# EAGLE board PR-Modem-PY (EAGLE 6.3)
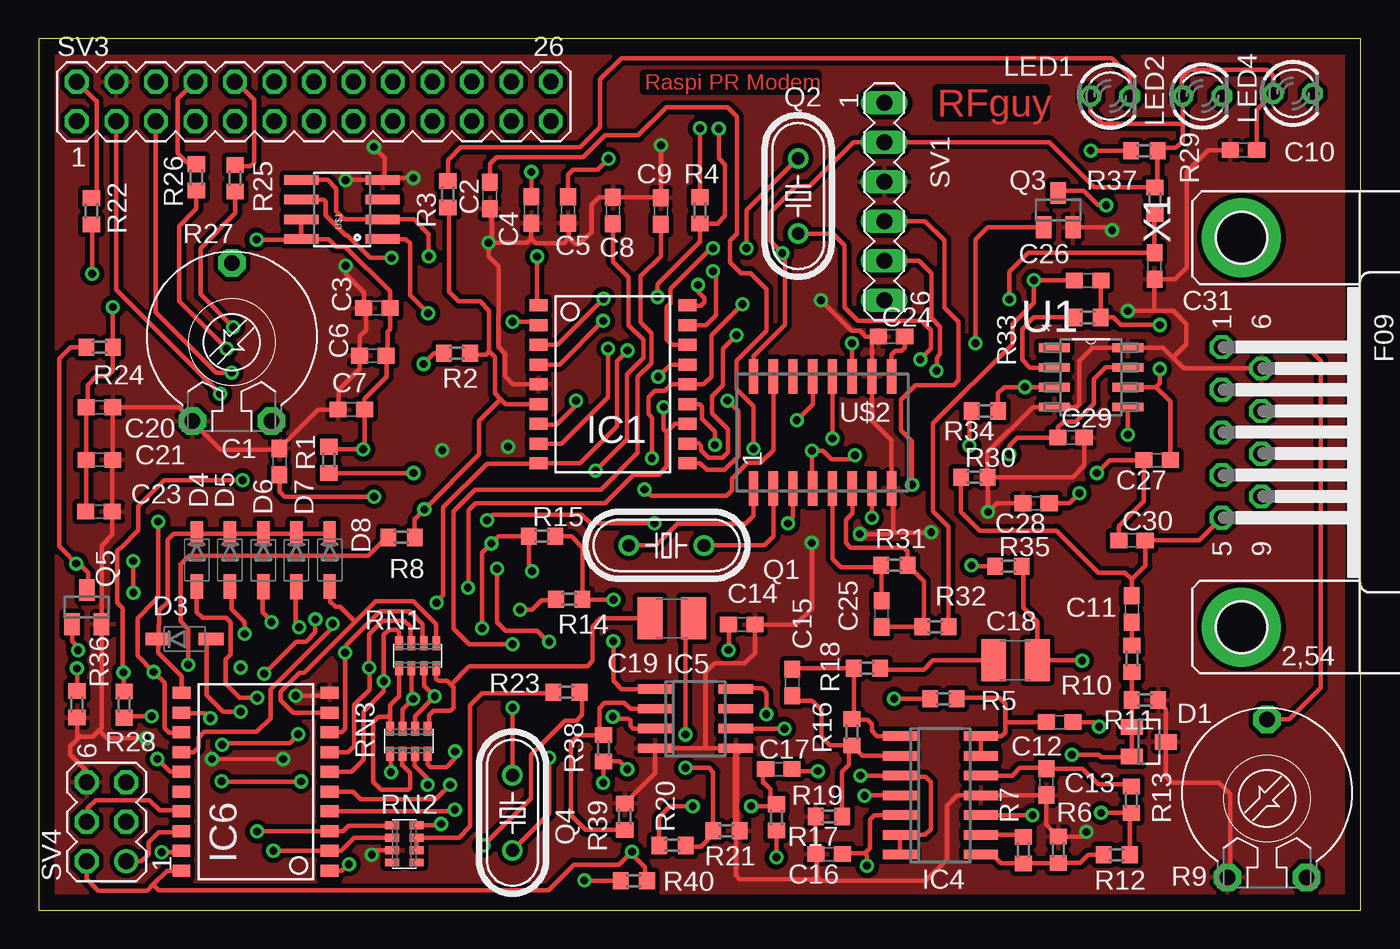
[diagram p0: board, top side]
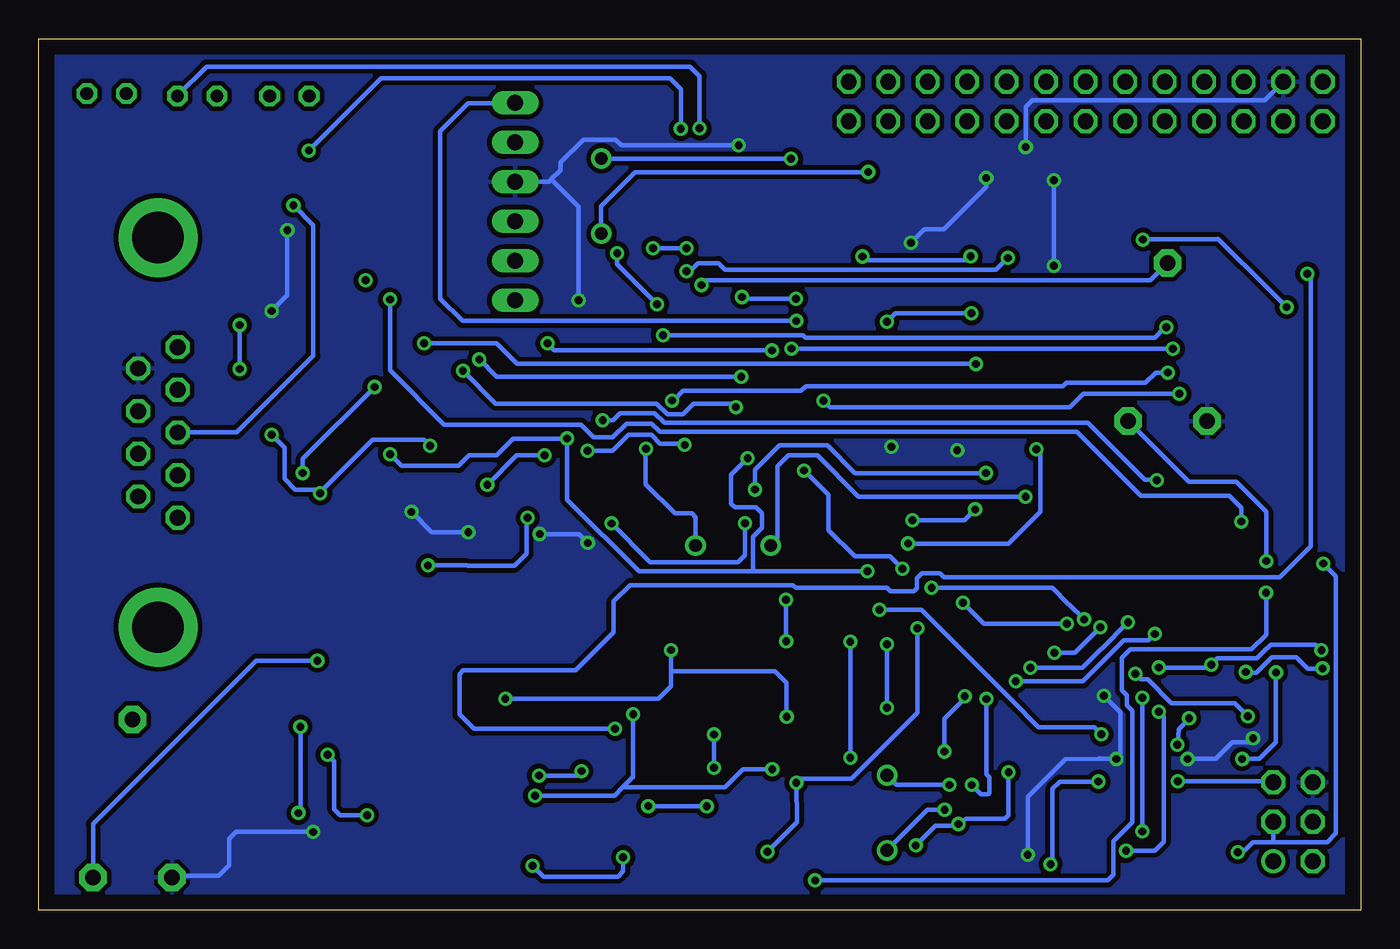
[diagram p1: board, bottom side, seen from below]

Size 85 x 56 mm. Coordinates in mm from the lower left corner, seen from the top.
Outline: 0,0 85,0 85,56 0,56 0,0
Copper layers (1*16): Top 0.035mm / dielectric 1.5mm / Bottom 0.035mm
Design rules "default": minimum track width 10mil, minimum drill 24mil, track to track 8mil, track to pad 8mil, pad to pad 8mil, via to via 8mil, smd to smd 8mil, copper to edge 40mil, drill to drill 8mil, minimum pad ring 10mil, minimum via ring 8mil, stop-mask expansion 4mil, vias tented up to drill 0mil, thermal gap 10mil

## Footprints (pad centres in the part's own frame; a part is rotated, then mirrored left to right if it is on the bottom)
C0603 = smd 1.1 x 1: 1 -0.85,0; 2 0.85,0
C1210 = smd 1.6 x 2.7: 1 -1.4,0; 2 1.4,0
SOT23 = smd 1 x 1.4: 1 -0.95,-1.1; 2 0.95,-1.1; 3 0,1.1
SOD123 = smd 1.6 x 0.8: 1 -1.7,0; 2 1.7,0
SOIC18-W = smd 0.762 x 1.143: 1 -5.08,-4.788; 2 -3.81,-4.788; 3 -2.54,-4.788; 4 -1.27,-4.788; 5 0,-4.788; 6 1.27,-4.788; 7 2.54,-4.788; 8 3.81,-4.788; 9 5.08,-4.788; 10 5.08,4.788; 11 3.81,4.788; 12 2.54,4.788; 13 1.27,4.788; 14 0,4.788; 15 -1.27,4.788; 16 -2.54,4.788; 17 -3.81,4.788; 18 -5.08,4.788
SO14 = smd 0.6 x 2.2: 1 -3.81,-2.6; 2 -2.54,-2.6; 3 -1.27,-2.6; 4 0,-2.6; 5 1.27,-2.6; 6 2.54,-2.6; 7 3.81,-2.6; 8 3.81,2.6; 9 2.54,2.6; 10 1.27,2.6; 11 0,2.6; 12 -1.27,2.6; 13 -2.54,2.6; 14 -3.81,2.6
SO08 = smd 0.6 x 2.2: 1 -1.905,-2.6; 2 -0.635,-2.6; 3 0.635,-2.6; 4 1.905,-2.6; 5 1.905,2.6; 6 0.635,2.6; 7 -0.635,2.6; 8 -1.905,2.6
SO20L = smd 0.762 x 1.143: 1 -5.08,-5.131; 2 -3.81,-5.131; 3 -2.54,-5.131; 4 -1.27,-5.131; 5 0,-5.131; 6 1.27,-5.131; 7 2.54,-5.131; 8 3.81,-5.131; 9 5.08,-5.131; 10 6.35,-5.131; 11 6.35,4.369; 12 5.08,4.394; 13 3.81,4.394; 14 2.54,4.394; 15 1.27,4.394; 16 0,4.394; 17 -1.27,4.394; 18 -2.54,4.394; 19 -3.81,4.394; 20 -5.08,4.394
LED3MM = drill 0.813 octagon: A -1.27,0; K 1.27,0
HC49/S = drill 0.813: 1 -2.413,0; 2 2.413,0
R0603 = smd 1 x 1.1: 1 -0.85,0; 2 0.85,0
PT-10 = drill 1.016 pad 1.778 octagon: 1 -2.54,-5.08; 2 2.54,-5.08; 3 0,5.08
CTS742C083 = smd 0.5 x 0.9: 1 -1.2,-0.8; 2 -0.4,-0.8; 3 0.4,-0.8; 4 1.2,-0.8; 5 1.2,0.8; 6 0.4,0.8; 7 -0.4,0.8; 8 -1.2,0.8
MA06-1 = drill 1.016 long: 1 -6.35,0; 2 -3.81,0; 3 -1.27,0; 4 1.27,0; 5 3.81,0; 6 6.35,0
MA13-2 = drill 1.016 octagon: 1 -15.24,-1.27; 2 -15.24,1.27; 3 -12.7,-1.27; 4 -12.7,1.27; 5 -10.16,-1.27; 6 -10.16,1.27; 7 -7.62,-1.27; 8 -7.62,1.27; 9 -5.08,-1.27; 10 -5.08,1.27; 11 -2.54,-1.27; 12 -2.54,1.27; 13 0,-1.27; 14 0,1.27; 15 2.54,-1.27; 16 2.54,1.27; 17 5.08,-1.27; 18 5.08,1.27; 19 7.62,-1.27; 20 7.62,1.27; 21 10.16,-1.27; 22 10.16,1.27; 23 12.7,-1.27; 24 12.7,1.27; 25 15.24,-1.27; 26 15.24,1.27
MA03-2 = drill 1.016: 1 -2.54,-1.27 | drill 1.016 octagon: 2 -2.54,1.27; 3 0,-1.27; 4 0,1.27; 5 2.54,-1.27; 6 2.54,1.27
SOIC127P600X175-8N = smd 1.981 x 0.559: 1 -2.362,1.905; 2 -2.362,0.635; 3 -2.362,-0.635; 4 -2.362,-1.905; 5 2.362,-1.905; 6 2.362,-0.635; 7 2.362,0.635; 8 2.362,1.905
SOIC8 = smd 0.61 x 2.21: 1 -1.905,-2.616; 2 -0.635,-2.616; 3 0.635,-2.616; 4 1.905,-2.616; 5 1.905,2.616; 6 0.635,2.616; 7 -0.635,2.616; 8 -1.905,2.616
SOIC16-3 = smd 0.6 x 2.2: 1 -4.445,-3.6; 2 -3.175,-3.6; 3 -1.905,-3.6; 4 -0.635,-3.6; 5 0.635,-3.6; 6 1.905,-3.6; 7 3.175,-3.6; 8 4.445,-3.6; 9 4.445,3.6; 10 3.175,3.6; 11 1.905,3.6; 12 0.635,3.6; 13 -0.635,3.6; 14 -1.905,3.6; 15 -3.175,3.6; 16 -4.445,3.6
F09HP = drill 1.016 octagon: 1 -5.486,-1.27; 2 -2.743,-1.27; 3 0,-1.27; 4 2.743,-1.27; 5 5.486,-1.27; 6 -4.115,1.27; 7 -1.372,1.27; 8 1.372,1.27; 9 4.115,1.27 | drill 3.302 pad 5.08: G1 -12.522,0; G2 12.522,0

## Placement (x,y rotation side)
C1  18p  [C0603]  15.47,28.82 270 top
C2  18p  [C0603]  29,45.94 90 top
C3  100n  [C0603]  21.73,38.69 0 top
C4  22p  [C0603]  31.67,45.01 90 top
C5  22p  [C0603]  34.03,45.01 90 top
C6  100n  [C0603]  21.48,35.63 0 top
C7  100n  [C0603]  20.09,32.17 0 top
C8  18p  [C0603]  36.92,44.97 270 top
C9  18p  [C0603]  40,44.94 270 top
C10  [C0603]  77.46,48.85 0 top
C11  100n  [C0603]  70.28,19.34 270 top
C12  470p  [C0603]  65.65,12.08 180 top
C13  220p  [C0603]  64.79,8.24 270 top
C14  * 1n  [C0603]  45.21,18.34 0 top
C15  *  [C0603]  48.44,14.63 270 top
C16  100p  [C0603]  50.82,3.59 180 top
C17  220p  [C0603]  47.59,9.06 180 top
C18  4u7  [C1210]  62.8,16.05 0 top
C19  1u  [C1210]  40.7,18.74 180 top
C20  100n  [C0603]  3.9,32.32 0 top
C21  100n  [C0603]  3.89,28.93 0 top
C23  100n  [C0603]  3.87,25.61 180 top
C24  100n  [C0603]  54.83,36.86 0 top
C25  100p  [C0603]  54.19,19.04 90 top
C26  100n  [C0603]  67.45,40.47 180 top
C27  10n  [C0603]  71.9,28.92 180 top
C28  100n  [C0603]  64.12,26.15 180 top
C29  100n  [C0603]  66.37,30.37 0 top
C30  10n  [C0603]  70.29,23.76 0 top
C31  [C0603]  71.74,41.39 90 top
D1  BAS70-04  [SOT23]  71.38,10.81 270 top
D3  [SOD123]  9.37,17.41 0 top
D4  [SOD123]  10.16,22.5 270 top
D5  [SOD123]  12.29,22.5 270 top
D6  [SOD123]  14.43,22.49 270 top
D7  [SOD123]  16.56,22.49 270 top
D8  [SOD123]  18.7,22.5 270 top
IC1  [SOIC18-W]  36.93,33.79 270 top
IC4  MCP6024  [SO14]  57.98,7.37 270 top
IC5  LM393D  [SO08]  42.22,12.3 270 top
IC6  AT90S2313S  [SO20L]  13.56,7.61 90 top
LED1  [LED3MM]  68.89,52.32 0 top
LED2  [LED3MM]  74.83,52.33 0 top
LED4  [LED3MM]  80.65,52.5 0 top
Q1  3,57MHz  [HC49/S]  40.36,23.44 180 top
Q2  20MHz  [HC49/S]  48.83,45.9 270 top
Q3  [SOT23]  65.55,44.99 0 top
Q4  9,8304MHZ  [HC49/S]  30.46,6.25 270 top
Q5  [SOT23]  3.08,19.47 0 top
R1  100k  [R0603]  18.65,28.93 270 top
R2  [R0603]  26.88,35.79 0 top
R3  [R0603]  26.3,46.02 270 top
R4  1k  [R0603]  42.52,44.97 90 top
R5  27k  [R0603]  58.17,13.58 180 top
R6  * 0  [R0603]  65.56,3.87 270 top
R7  0  [R0603]  63.3,3.85 270 top
R8  10k  [R0603]  23.32,23.95 0 top
R9  [PT-10]  78.98,7.17 0 top
R10  10k  [R0603]  70.28,16.16 270 top
R11  1M  [R0603]  71.13,13.5 180 top
R12  82k  [R0603]  69.31,3.56 0 top
R13  39k  [R0603]  70.25,7.08 90 top
R14  10k  [R0603]  34.11,19.97 180 top
R15  10k  [R0603]  32.36,24.03 0 top
R16  0  [R0603]  52.28,11.43 270 top
R17  *  [R0603]  50.8,6.01 180 top
R18  27  [R0603]  53.25,15.54 180 top
R19  56k  [R0603]  47.43,5.95 90 top
R20  100k  [R0603]  40.74,4.15 0 top
R21  100k  [R0603]  44.21,5.1 0 top
R22  27k  [R0603]  3.38,44.93 90 top
R23  5k1  [R0603]  33.92,14 180 top
R24  10k  [R0603]  3.9,36.18 180 top
R25  0  [R0603]  12.62,47.05 270 top
R26  0  [R0603]  10.13,47.09 270 top
R27  [PT-10]  12.41,36.51 0 top
R28  10k  [R0603]  5.49,13.21 270 top
R29  10k  [R0603]  71.08,48.82 180 top
R30  1k  [R0603]  60.16,27.83 0 top
R31  100k  [R0603]  55.03,22.17 0 top
R32  100k  [R0603]  57.65,18.22 0 top
R33  24k8  [R0603]  67.44,38.09 0 top
R34  18k7  [R0603]  60.84,32.08 180 top
R35  10k  [R0603]  62.35,22.1 0 top
R36  10k  [R0603]  2.45,13.22 270 top
R37  10k  [R0603]  71.77,45.61 270 top
R38  10k  [R0603]  36.3,10.4 90 top
R39  10k  [R0603]  37.68,6 90 top
R40  10k  [R0603]  38.26,1.87 180 top
RN1  10K  [CTS742C083]  24.36,16.35 180 top
RN2  10K  [CTS742C083]  23.5,4.25 270 top
RN3  5k1  [CTS742C083]  23.79,10.86 0 top
SV1  [MA06-1]  54.37,45.54 270 top
SV3  [MA13-2]  17.68,51.97 0 top
SV4  [MA03-2]  4.35,5.67 90 top
U1  MCP6023-I/SN  [SOIC127P600X175-8N]  67.66,34.24 0 top
U$1  23K640SN  [SOIC8]  19.49,45.03 90 top
U$2  MX614  [SOIC16-3]  50.4,30.7 0 top
X1  [F09HP]  77.34,30.7 270 top

## Library data of the parts
C1-C21 C23-C31 R1-R40 = rcl
D1 = diode
D3-D8 Q3 Q5 = semicon-smd-ipc
IC1 = AWJLEagleLib
IC4 IC5 = linear
IC6 = atmel; OC_FARNELL: unknown; OC_NEWARK: unknown
LED1 LED2 LED4 = led
Q1 Q2 Q4 = crystal; OC_FARNELL: 1667008; OC_NEWARK: unknown
RN1-RN3 = resistor-net; OC_FARNELL: unknown; OC_NEWARK: unknown
SV1 SV3 SV4 = con-lstb; OC_FARNELL: unknown; OC_NEWARK: unknown
U1 = Microchip_By_element14_Batch_1; MPN: MCP6023-I/SN; OC_FARNELL: 1629353; OC_NEWARK: 92C2412; PACKAGE: 8 SOIC; SUPPLIER: Microchip
U$1 = SparkFun
U$2 = Ava
X1 = con-subd; OC_FARNELL: unknown; OC_NEWARK: unknown

## Nets
+3.3V: C3.2 C6.2 C7.2 C10.2 C20.1 C21.1 C23.2 C29.1 IC1.14 IC4.4 IC5.8 IC6.20 LED1.A LED2.A LED4.A R1.1 R15.1 R24.1 R29.1 R37.1 R38.1 R40.1 SV1.2 SV4.2 U1.7 U$1.7 U$1.8 U$2.12 U$2.16
+5V: R22.2 SV3.2
GND: C1.1 C2.1 C3.1 C4.1 C5.1 C6.1 C7.1 C8.1 C9.1 C10.1 C13.2 C14.2 C16.2 C20.2 C21.2 C23.1 C24.1 C28.2 C29.2 C31.1 D1.3 IC1.5 IC4.11 IC5.4 IC5.5 IC6.10 Q3.2 Q5.2 R6.1 R9.1 R11.1 R17.2 R21.2 R27.1 R30.2 R36.2 R39.2 RN2.3 SV1.3 SV3.4 SV4.6 U1.4 U1.8 U$1.4 U$2.8 U$2.10 X1.6
N$1: C1.2 Q1.2 U$2.1
N$2: C2.2 Q1.1 U$2.2
N$3: R1.2 U$2.15
N$4: IC6.15 R28.1 U$2.13
N$5: C4.2 IC1.15 Q2.2
N$6: C8.2 IC6.4 Q4.2
N$7: C5.2 IC1.16 Q2.1
N$8: C25.2 R31.1 U$2.5
N$9: IC1.1 U$1.2 U$1.5
N$10: IC1.2 U$1.1
N$11: IC1.17 U$1.6
N$12: IC1.9 IC6.14 U$2.11
N$13: Q3.1 R2.1
N$14: C25.1 R31.2 R32.1 U$2.6
N$15: LED1.K R3.1
N$16: IC1.3 R4.1 R29.2
N$17: LED2.K R4.2
N$18: IC1.6 R2.2 R3.2 R8.2 U$2.3
N$19: C9.2 IC6.5 Q4.1
N$20: IC1.13 SV1.4 U$2.4
N$21: IC1.12 R28.2 SV1.5
N$22: C11.2 R10.1
N$23: D1.1 D1.2 IC4.10 R10.2 R11.2
N$24: IC4.9 R7.1
N$25: IC4.8 R6.2 R7.2 R12.1
N$26: C14.1 IC5.3 R5.2
N$27: C12.1 R12.2 R13.1
N$28: C13.1 IC4.12 R13.2
N$29: C12.2 IC4.13 IC4.14 R5.1
N$30: IC5.1 R14.1 R15.2
N$31: C15.1 IC4.1 R16.1 R18.2
N$32: C15.2 IC4.2 R16.2 R17.1
N$33: C17.1 IC4.3 IC4.6 IC4.7
N$34: R9.3 X1.1
N$35: C16.1 IC4.5 R19.1
N$36: C17.2 R19.2 R20.1
N$37: C19.1 R20.2 R21.1
N$38: C18.1 R18.1
N$39: IC5.6 R22.1
N$40: C19.2 RN1.8 RN3.5
N$41: RN1.7 RN3.4 RN3.6
N$42: RN1.6 RN3.3 RN3.7
N$43: RN1.5 RN3.2 RN3.8
N$44: R23.2 RN2.6 RN2.7
N$45: R23.1 RN2.8 RN3.1
N$46: D3.2 IC6.2 RN2.2
N$47: D4.2 IC6.3 RN2.1
N$48: D5.2 IC6.6 RN1.4
N$49: D6.2 IC6.7 RN1.3
N$50: D7.2 IC6.8 RN1.2
N$51: D8.2 IC6.9 RN1.1
N$52: D3.1 D4.1 D5.1 D6.1 D7.1 D8.1 IC6.11
N$53: IC6.12 R14.2
N$54: C24.2 U$2.9
N$55: IC6.19 Q5.3 R24.2 SV4.3
N$56: C26.2 R32.2
N$57: IC5.2 R38.2 R39.1
N$58: Q5.1 R8.1
N$59: C11.1 C30.2 R30.1 X1.5
N$60: IC1.7 SV3.3
N$61: IC1.10 SV3.5
N$62: IC1.4 SV1.1
N$63: C26.1 C27.1 R33.2 U1.6
N$64: R33.1 U1.2
N$65: C27.2 C30.1 R34.1 U1.3
N$66: C28.1 R34.2 U1.5
N$67: C18.2 R9.2 R35.2
N$68: IC1.11 R25.2
N$69: R35.1 U$2.7
N$70: R25.1 SV3.10
N$71: IC6.18 SV4.1
N$72: IC6.1 SV4.5
N$73: IC6.17 SV4.4
N$74: Q3.3 X1.3
N$75: IC1.8 R26.2
N$76: C31.2 IC6.13 R36.1 R37.2
N$77: IC6.16
N$78: R26.1 SV3.8
N$79: R27.2 R40.2
N$80: IC1.18 R27.3

## Tracks (layer width: path | path; a pad name or v marks a point on that pad's centre or on a via)
+3.3V  (via drill 0.5)
  Top 0.254: 28.51,20.65 28.51,20.64
  Top 0.305: C10.2 78.31,51.43 LED4.A 79.38,53.63 78.98,54.03 74.01,54.03 73.49,53.51 73.49,52.4 LED2.A 73.56,50.51 | 73.56,50.51 73.56,49.42 73.13,48.99 72.1,48.99 R29.1 71.93,46.62 R37.1 67.87,46.46 64.99,49.34 54.88,49.34 | IC4.4 53.12,7.37 v53.1,7.35 | IC5.8 44.87,14.16 45.48,14.16 45.56,14.24 46.52,14.24 46.78,13.98 v46.78,12.58 | v36.29,8.18 36.3,8.34 R38.1 37.33,9.55 v37.84,9.04 | R40.1 38.98,2 38.98,2.74 38.15,3.57 v38.15,3.75 37.31,2.91 34.41,2.91 32.78,1.28 7.69,1.28 7.35,1.62 7.33,1.62 | 7.33,1.62 6.96,1.25 3.81,1.25 3.33,1.73 3.33,1.74 3.08,1.99 SV4.2 | IC6.20 8.24,2.53 7.33,1.62 | C23.2 3.04,25.63 C21.1 C20.1 3.14,32.41 3.14,33.75 3.69,34.3 4.4,34.3 4.76,34.66 R24.1 v4.76,38.76 | U$1.7 U$1.8 | 28.51,20.65 28.51,22.97 v29.1,23.56 29.57,24.03 R15.1 31.51,21.97 v31.71,21.77 | R1.1 18.81,29.62 v20.86,29.62 20.94,29.7 C7.2 20.94,32.86 22.35,34.27 22.35,35.61 C6.2 22.42,35.72 22.42,37.16 22.58,37.32 C3.2 22.58,39.77 19.7,42.65 19.11,42.65 18.64,43.12 U$1.8 | v14,43.1 16.85,43.1 U$1.8 | 46.11,34.45 U$2.16 45.95,35.59 47.98,37.61 47.98,42.05 v47.81,42.22 47.04,42.99 47.04,44.86 48.7,46.52 49.55,46.52 52.38,49.35 SV1.2 | v39.42,29.05 39.42,31.66 39.19,31.89 39.19,32.96 39.61,33.38 40.28,33.38 40.69,33.79 IC1.14 42.75,33.79 43.24,34.28 43.24,36.95 v45.24,38.95 | v51.04,30.31 U$2.12 | LED1.A 67.62,51.33 68.4,50.55 73.52,50.55 73.56,50.51 | SV1.2 54.87,49.35 54.88,49.34 | 54.88,49.34 SV1.2 | v62.42,29.3 62.42,29.85 62.94,30.37 C29.1 65.52,31.02 65.9,31.4 66.69,31.4 67.85,32.56 67.85,34.13 68.6,34.88 U1.7 | 28.5,20.64 28.51,20.64 v28.51,18.11
  Bottom 0.254: 9.18,43.15 9.2,43.12
  Bottom 0.305: v53.1,7.35 47.99,7.35 47.42,7.92 | 47.42,7.92 46.81,8.53 46.78,8.53 v46.78,12.58 | v38.15,3.75 36.26,5.64 v36.29,8.18 36.04,8.43 32.76,8.43 28.5,12.69 v28.5,18.11 v28.51,18.11 | v37.84,9.04 39.71,9.04 40.87,7.88 47.39,7.88 47.42,7.92 | 9.18,43.15 5.88,39.88 v4.76,38.76 | v29.1,23.56 22.66,23.56 20.61,25.61 20.61,29.37 v20.86,29.62 | 9.16,43.12 9.2,43.12 13.97,43.12 v14,43.1 | v31.71,21.77 38.98,21.77 | 38.98,21.77 46.42,21.77 51.03,26.38 v51.03,30.3 v51.04,30.31 54.49,30.31 55.58,29.22 57.33,29.22 58,28.55 61.67,28.55 v62.42,29.3 | 38.98,21.77 38.96,21.79 39.07,21.9 39.07,23.98 38.49,24.56 38.49,25.49 38.88,25.88 40.25,25.88 40.5,26.13 40.5,27.97 v39.42,29.05 | v47.81,42.22 47.81,41.52 v45.24,38.95
+5V
  Top 0.305: R22.2 3.71,45.78 3.71,52.03 3.65,52.03 SV3.2
GND  (via drill 0.5)
  Top 0.305: R11.1 72.48,12.9 D1.3 72.48,8.59 72.89,8.18 75.88,8.18 76.62,7.44 76.62,2.27 R9.1 | R39.2 39.62,8.79 IC5.4 42.86,10.39 | 45.06,10.15 IC5.5 42.86,10.39 | 42.86,10.39 42.88,10.41 42.88,15.27 43.46,15.85 45.39,15.85 46.06,16.52 C14.2 48.66,18.34 49.7,19.38 v49.7,23.6 | R17.2 49.95,3.61 C16.2 50.04,3.52 50.04,2.14 | R21.2 44.88,5.1 44.82,5.04 44.82,2.22 45.06,1.98 49.88,1.98 50.04,2.14 | v67.37,5.02 67.07,4.72 R6.1 64.79,5.49 C13.2 64.77,7.37 IC4.11 59.07,7.37 58.39,6.69 58.39,3.24 57.02,1.87 50.31,1.87 50.04,2.14 | 54.96,24.43 54.96,26.98 U$2.8 54.82,27.12 54.82,30.21 53.58,31.45 U$2.10 53.58,36.86 C24.1 53.2,36.86 52.81,37.25 52.24,37.25 v50.29,39.2 | v52.79,24.17 54.7,24.17 54.96,24.43 | IC1.5 30.5,33.79 29.99,34.3 29.99,35.76 29.55,36.2 29.55,41.38 28.91,42.02 v28.91,42.88 v28.92,42.89 | C2.1 29.16,44.93 29.16,43.13 v28.92,42.89 | C4.1 31.66,43.16 | 54.96,24.43 54.96,24.33 54.89,24.26 57.36,24.26 v57.38,24.28 | R30.2 61.04,27.8 v61.04,25.59 61.6,26.15 C28.2 | SV4.6 3.08,8.91 2.02,9.97 2.02,10.53 2.45,10.96 | 3.88,11.56 4.03,11.71 Q5.2 4.03,23.43 4.72,24.12 C23.1 4.72,28.91 C21.2 C20.2 8.98,32.32 R27.1 9.87,31.4 11.69,29.58 15.38,29.58 C1.1 17.97,32.17 C7.1 19.27,32.2 19.27,33.43 20.63,34.79 C6.1 20.63,36.88 21.03,37.28 21.03,38.54 C3.1 20.93,38.74 20.93,39.67 19.73,40.87 v19.72,41.42 | 3.88,11.56 3.46,11.14 2.63,11.14 | 2.63,11.14 2.45,10.96 | 2.55,11.22 2.63,11.14 | R36.2 2.45,10.96 | RN2.3 21.7,3.85 v21.41,3.56 | IC6.10 18.5,13.77 v16.52,13.78 | v6.92,11.05 4.39,11.05 3.88,11.56 | v15.71,9.71 15.11,9.7 v11.13,9.71 | v21.54,49.05 22.23,48.36 22.23,47.06
  Top 0.305: 22.23,47.06 U$1.4 19.75,46.94 v19.73,46.91 | v28.92,42.89 31.39,42.89 31.66,43.16 | 22.23,47.06 v24.08,47.06 | 34.11,43.2 34.11,44.08 C5.1 | 34.11,43.2 33.76,42.85 31.97,42.85 31.66,43.16 | 34.11,43.2 34.51,42.8 34.75,42.8 35.53,43.58 35.53,45.33 36.02,45.82 C8.1 39.97,45.82 C9.1 v40,49.16 | R30.2 66.48,27.83 67.23,28.58 C29.2 | C10.1 75.2,48.85 73.82,47.47 73.82,41.32 73.04,40.54 C31.1 71.74,38.54 71.71,38.51 | Q3.2 68.82,43.89 v69.02,43.69 | U1.8 | X1.6 73.62,34.81 72.94,35.51 | 72.94,35.51 72.29,36.15 U1.8 | R30.2 61.01,29.43 63.91,32.34 U1.4 66.67,32.34 66.9,32.56 66.9,35.3 67.75,36.15 U1.8 | v70.03,38.51 71.71,38.51 | 71.71,38.51 72.96,38.51 73.8,37.67 73.8,36.37 72.94,35.51
  Top 0.406: R21.2 44.82,5.1 IC5.5
  Bottom 0.305: v67.37,5.02 72.32,5.02 72.77,4.57 72.77,2.87 73.44,2.2 76.33,2.2 R9.1 | v52.79,24.17 50.27,24.17 v49.7,23.6 | v57.38,24.28 59.73,24.28 v61.04,25.59 | v21.41,3.56 21.41,7.27 18.98,9.7 v15.71,9.71 | v11.13,9.71 9.32,9.72 8.24,10.8 7.17,10.8 v6.92,11.05 | 16.81,9.74 v15.71,9.71 | v16.52,13.78 v16.51,13.78 15.45,12.72 15.45,9.97 v15.71,9.71 | v21.54,49.05 21.54,51.65 21.12,52.07 6.15,52.07 SV3.4 | v19.73,46.91 v19.72,41.42 | v28.92,42.89 28.05,43.76 26.81,43.76 24.08,46.49 v24.08,47.06 | v40,49.16 47.54,49.16 47.91,49.53 49.98,49.53 51.45,48.06 51.45,47.57 52.05,46.97 | 52.05,46.97 52.2,46.82 SV1.3 | v50.29,39.2 50.29,45.21 52.05,46.97 | v69.02,43.69 69.02,39.52 v70.03,38.51
  other vias: 25.94,29.55 30.17,29.78
  pour Top (isolate 0.305): 0,56 85,56 85,0 0,0
  pour Bottom (isolate 0.305): 0,56 85,56 85,0 0,0
N$1  (via drill 0.5)
  Top 0.305: Q1.2 39.68,23.44 41.06,24.82 45.45,24.82 45.97,25.34 45.97,27.09 U$2.1 | C1.2 15.47,26.88 15.79,26.56 v21.54,26.56 v21.55,26.57
  Bottom 0.305: v21.55,26.57 32.28,26.57 34.94,29.23 36.79,29.23 37.49,28.53 37.49,23.9 Q1.2
N$2  (via drill 0.5)
  Top 0.305: U$2.2 47.23,24.02 46.65,23.45 42.78,23.45 Q1.1 | C2.2 29,47.97 29.42,48.39 35,48.39 36.4,49.79 38.54,49.79 40.35,51.6 44.27,51.6 44.89,50.98 44.89,43.47 44.45,43.03 44.45,41.65 45.16,40.94 45.75,40.94 46.78,39.91 46.78,37.23 44.86,35.31 44.86,33.48 45.96,32.38 v45.96,29.66
  Bottom 0.305: v45.96,29.66 45.98,29.64 45.98,27.38 44.1,25.5 43.01,25.5 42.77,25.26 Q1.1
N$3  (via drill 0.5)
  Top 0.305: R1.2 23.86,28.09 v24.1,28.09 | U$2.15 47.23,29.57 46.4,28.74 45.58,28.74 44.56,27.72 44.56,26.97 44.21,26.62 39.38,26.62 38.97,27.03 v38.95,27.03
  Bottom 0.305: v24.1,28.09 32.51,28.09 34.29,29.87 37.38,29.87 38.95,28.3 v38.95,27.03
N$4  (via drill 0.5)
  Top 0.305: IC6.15 8.45,8.88 v7.62,9.71 | v5.44,15.27 5.45,14.1 R28.1 | U$2.13 49.77,32.52 v48.74,31.49 | v13.1,27.63 8.06,27.63 6.4,25.97 6.4,24.42 5.28,23.3 5.27,23.3 5.05,23.08 5.05,19.75 5.4,19.4 5.4,15.31 v5.44,15.27 | 5.28,15.43 v5.44,15.27
  Bottom 0.305: v7.62,9.71 6.53,9.71 5.46,10.78 5.46,15.4 v5.44,15.27 | v48.74,31.49 48.09,31.49 47.64,31.94 45.41,31.94 44.78,31.31 17.55,31.31 13.89,27.65 13.12,27.65 v13.1,27.63
N$5  (via drill 0.5)
  Top 0.305: C4.2 v31.67,47.44 | IC1.15 40.61,35.06 v39.83,34.28 | v56.68,35.39 57.38,36.09 57.38,37.26 56.77,37.87 52.67,37.87 51.8,38.74 51.8,42.75 51.06,43.49 Q2.2
  Bottom 0.305: v31.67,47.44 46.65,47.44 48.86,45.23 48.86,43.52 Q2.2 | v39.83,34.28 55.56,34.28 v56.67,35.39 v56.68,35.39
N$6  (via drill 0.5)
  Top 0.305: IC6.4 26.64,6.34 v26.75,6.45 | v32.82,9.79 32.82,6.2 Q4.2 | v32.82,17.24 32.75,17.24 32.04,17.95 30.01,17.95 29.47,18.49 v29.47,21.94 | C8.2 36.92,41.68 37.93,40.67 37.93,37.6 38.87,36.66 38.87,35.51 37.81,34.45 37.81,30.25 37.66,30.1 37.65,30.1 v35.8,28.25
  Bottom 0.305: v26.75,6.45 27.85,6.45 Q4.2 | v32.82,9.79 v32.82,17.24 | v35.8,28.25 35.77,28.25 34.21,26.69 34.21,24.41 32.53,22.73 30.26,22.73 v29.47,21.94
N$7  (via drill 0.5)
  Top 0.305: C5.2 34.03,47.27 34.36,47.6 35.94,47.6 v36.63,48.29 | IC1.16 40.73,36.33 40.37,36.69 40.37,38.75 40.61,38.99 40.61,39.95 43.21,42.55 v43.35,42.55 | v45.5,42.55 45.5,44.98 Q2.1
  Bottom 0.305: v36.63,48.29 48.81,48.29 Q2.1 | v43.35,42.55 v45.5,42.55
N$8
  Top 0.305: 54.19,22.5 R31.1 | C25.2 R31.1 | U$2.5 51.03,22.59 51.59,22.03 54.04,22.03 R31.1
N$9  (via drill 0.5)
  Top 0.305: U$1.5 18.55,46.94 19.11,46.38 19.11,44.91 19.63,44.39 U$1.2 | U$1.2 | U$1.2 24.13,44.39 25.07,43.45 v25.07,42.03 v25.08,42.02 | v32.03,42.01 32.03,38.98 IC1.1
  Bottom 0.305: v25.08,42.02 25.34,41.76 31.73,41.76 v32.03,42.01
N$10  (via drill 0.5)
  Top 0.305: U$1.1 23.59,43.12 23.87,42.85 23.87,39.52 v25.03,38.36 | v30.46,37.81 31.93,37.81 IC1.2
  Bottom 0.305: v25.03,38.36 29.91,38.36 v30.46,37.81
N$11  (via drill 0.5)
  Top 0.305: U$1.6 18.32,45.66 18.45,45.53 18.45,44.67 19.74,43.38 19.83,43.38 21.29,41.92 v22.68,41.92 | IC1.17 42.9,37.6 43.53,38.23 43.53,40.9 v43.36,41.07
  Bottom 0.305: v22.68,41.92 23.44,41.16 40.88,41.16 41.31,41.59 42.62,41.59 43.14,41.07 v43.36,41.07
N$12  (via drill 0.5)
  Top 0.305: IC6.14 9.97,10.15 10.27,10.45 10.27,11.08 10.64,11.45 14.02,11.45 14.89,12.32 14.89,14.18 18.37,17.66 18.37,17.67 18.79,18.09 18.79,18.31 v18.89,18.41 | v25.57,19.75 25.57,19.79 26.01,20.23 26.01,25.88 28.83,28.7 IC1.9 34.79,28.71 36.98,30.9 36.98,30.91 37.18,31.11 37.18,35.29 v37.86,35.97 | v52.29,36.43 52.3,36.39 U$2.11
  Bottom 0.305: v18.89,18.41 24.23,18.41 v25.57,19.75 | v37.86,35.97 51.88,35.97 v52.29,36.43
N$13  (via drill 0.5)
  Top 0.305: R2.1 25.42,35.78 v24.74,35.1 | Q3.1 61.03,43.89 60.23,43.09 v60.23,36.44 v60.22,36.43
  Bottom 0.305: v24.74,35.1 24.89,35.11 54.24,35.11 55.56,36.43 v60.22,36.43
N$14
  Top 0.305: C25.1 54.22,18.22 R32.1 56.9,18.32 56.9,21.15 R31.2 | R31.2 56.09,22.51 | 55.81,22.24 R31.2 | U$2.6 52.3,25.52 51.89,25.1 51.89,23.6 52.19,23.3 55.63,23.3 55.86,23.07 55.86,22.19 R31.2
N$15
  Top 0.305: R3.1 26.3,48.21 27.11,49.02 34.81,49.02 36.1,50.31 36.1,53.41 37.46,54.77 69.01,54.77 70.16,53.62 LED1.K
N$16  (via drill 0.5)
  Top 0.305: IC1.3 33.34,36.33 v36.31,39.3 | v39.78,39.41 39.79,40.22 42.52,42.95 R4.1 43.63,44.12 44.13,44.62 44.13,47.92 43.73,48.32 v43.73,50.21 v43.72,50.22 | v67.64,48.82 R29.2
  Bottom 0.305: v36.31,39.3 39.52,39.3 v39.78,39.41 | v43.72,50.22 43.72,52.76 44.42,53.46 63,53.46 v67.64,48.82
N$17  (via drill 0.5)
  Top 0.305: R4.2 v42.52,50.24 v42.51,50.25
  Bottom 0.305: v42.51,50.25 42.51,53.61 43.12,54.22 74.21,54.22 LED2.K
N$18  (via drill 0.5)
  Top 0.305: R3.2 26.37,45.17 26.37,39.75 27,39.12 28.37,39.12 28.95,38.53 28.95,35.91 | 28.95,35.91 28.75,35.71 27.81,35.71 R2.2 | IC1.6 30.02,32.52 | 30.02,32.52 29.7,32.84 | 29.7,32.84 29.33,33.21 29.33,35.54 28.95,35.91 | R8.2 24.17,25.14 24.18,25.14 v24.79,25.75 v24.79,25.76 28.32,29.29 28.32,31.45 29.7,32.84 | 30.03,32.51 30.02,32.52 | v28.82,25.06 29.17,25.41 34.91,25.41 35.47,24.85 38.52,24.85 38.53,24.86 v39.59,24.86 | v48.18,24.85 48.18,24.93 48.49,25.25 U$2.3
  Bottom 0.305: v39.59,24.86 39.59,22.81 40.04,22.36 45.69,22.36 v48.18,24.85 | v28.82,25.06 25.48,25.06 v24.79,25.75
N$19  (via drill 0.5)
  Top 0.305: IC6.5 20.2,7.61 20.69,7.12 25.52,7.12 v26.44,8.04 | Q4.1 v30.46,13 | v30.46,17.09 27.65,17.09 26.66,18.08 26.66,25.62 28.05,27.01 36.14,27.01 38.51,29.38 38.51,34.27 39.4,35.16 39.4,37.07 38.7,37.77 38.7,40.73 40,42.03 C9.2
  Bottom 0.305: 30.39,8.6 Q4.1 29.84,8.04 v26.44,8.04 | v30.46,13 v30.46,17.09
N$20  (via drill 0.5)
  Top 0.305: U$2.4 49.72,27.14 v49.72,29.53 50.42,29.53 50.97,28.98 52.23,28.98 v52.48,29.23 | v43.47,29.9 43.47,30.76 42.65,31.58 42.65,32.34 42.47,32.52 IC1.13 | v56.16,27.34 56.16,30.12 55.43,30.85 55.43,32.8 56.38,33.75 58.83,33.75 59.12,34.04 59.12,37.83 58.22,38.73 58.22,43.06 56.99,44.29 54.39,44.29 SV1.4
  Bottom 0.305: v49.72,29.53 48.1,29.53 47.09,30.54 45.6,30.54 45.04,29.98 43.55,29.98 v43.47,29.9 | v52.48,29.23 54.27,29.23 v56.16,27.34
N$21  (via drill 0.5)
  Top 0.305: IC1.12 40.91,31.25 40.37,30.71 | v27.59,20.71 27.63,20.83 27.63,25.7 28.08,26.15 36.41,26.15 38.25,27.99 39.87,27.99 40.37,28.49 40.37,30.71 | v17.78,18.68 17.78,17.85 17.18,17.25 16.56,17.25 v14.49,15.18 | v7.25,12.45 5.58,12.45 R28.2 | SV1.5 56.59,41.73 57.4,40.92 57.4,38.06 57.95,37.51 57.95,35.72 57.74,35.51 v57.74,34.67 v57.73,34.66 | v40.18,32.33 40.18,30.9 40.37,30.71
  Bottom 0.305: v17.78,18.68 18.77,19.67 18.78,19.67 19.83,20.72 v27.58,20.72 v27.59,20.71 | v7.25,12.45 8.1,13.3 12.16,13.3 13.69,14.83 14.14,14.83 v14.49,15.18 | v40.18,32.33 40.39,32.54 42.91,32.54 43.59,31.86 44.57,31.86 45.27,32.56 55.63,32.56 v57.73,34.66
N$22
  Top 0.305: C11.2 R10.1
N$23  (via drill 0.5)
  Top 0.305: D1.2 D1.1 R11.2 R10.2 | IC4.10 v63.9,6.1 | 70.22,9.8 D1.2 | v66.43,9.98 68.18,9.98 68.33,9.83 70.25,9.83 D1.2
  Bottom 0.305: v63.9,6.1 65.63,6.1 66,6.47 66,9.55 v66.43,9.98
N$24
  Top 0.305: IC4.9 63.17,4.83 R7.1
N$25
  Top 0.305: R12.1 67.5,3.56 66.98,3.04 65.58,3.04 R6.2 63.32,3.02 R7.2 61.86,3 61.32,3.54 60.6,3.54 IC4.8
N$26  (via drill 0.5)
  Top 0.305: R5.2 v55,13.58 | v44.34,16.71 44.41,18.29 C14.1 | IC5.3 38.22,11.66 38.04,11.84 38.04,12.19 37.92,12.31 36.92,12.31 v36.91,12.42
  Bottom 0.305: v55,13.58 45.16,13.58 44.35,14.39 44.35,15.25 | 44.35,15.25 44.35,16.34 v44.34,16.71 | v36.91,12.42 36.91,14.61 37.66,15.36 44.24,15.36 44.35,15.25
N$27  (via drill 0.5)
  Top 0.305: R12.2 70.16,6.14 R13.1 v68.31,6.24 | C12.1 67.88,12.08 v68.18,11.78
  Bottom 0.305: v68.18,11.78 68.18,6.37 v68.31,6.24
N$28
  Top 0.305: IC4.12 62.59,8.64 63.09,9.14 64.74,9.14 C13.1 67.12,9.09 68.14,8.07 70.11,8.07 R13.2
N$29
  Top 0.305: IC4.13 IC4.14 61.9,11.18 62.15,11.43 62.15,12.14 | 62.15,12.14 62.15,13.27 61.76,13.66 59.1,13.66 R5.1 | C12.2 62.21,12.08 62.15,12.14
N$30  (via drill 0.5)
  Top 0.305: R15.2 34.24,24.02 34.96,23.3 R14.1 34.98,19.95 v36.96,19.95 | IC5.1 37.48,14.21 36.94,14.75 v36.94,17.27
  Bottom 0.305: v36.94,17.27 36.94,19.82 v36.96,19.95
N$31
  Top 0.305: IC4.1 53.9,11.18 53.56,11.52 53.56,11.93 53.27,12.22 52.34,12.22 R16.1 | 52.47,12.47 R16.1 | R16.1 52.4,12.4 R18.2 48.13,15.54 C15.1
N$32
  Top 0.305: 52.22,10.52 R16.2 | IC4.2 52.95,9.91 R16.2 | R16.2 50.87,10.58 50.32,11.13 50.32,12.86 49.73,13.45 48.12,13.45 C15.2 | 52.06,10.36 R16.2 | R17.1 51.65,8.9 52.1,9.35 52.1,10.4 R16.2
N$33  (via drill 0.5)
  Top 0.305: IC4.7 IC4.6 56.99,4.83 57.35,5.19 57.35,8.22 57,8.57 55.45,8.57 IC4.3 v52.84,8.64 | v50.11,8.93 48.57,8.93 C17.1
  Bottom 0.305: v52.84,8.64 50.4,8.64 v50.11,8.93
N$34
  Top 0.305: R9.3 80.4,12.25 82.44,14.29 82.44,35.31 81.59,36.16 76.1,36.16 X1.1
N$35  (via drill 0.5)
  Top 0.305: IC4.5 53.72,6.1 53.43,5.81 53.43,3.96 53.11,3.64 | 53.11,3.64 51.72,3.64 C16.1 | R19.1 v47.43,3.39 | v53.26,2.84 53.26,3.49 53.11,3.64
  Bottom 0.305: 53.29,2.81 v53.26,2.84 52.56,2.14 47.77,2.14 47.43,2.48 v47.43,3.39
N$36  (via drill 0.5)
  Top 0.305: R19.2 47.52,7.16 | R20.1 39.89,5.95 40.6,6.66 v42.04,6.66 v42.05,6.67 | v45.81,6.68 47.78,6.68 R19.2 | C17.2 46.58,9.06 46.58,8.17 46.63,8.17 47.05,7.75 47.05,7.18 R19.2
  Bottom 0.305: v42.05,6.67 45.93,6.67 v45.81,6.68
N$37  (via drill 0.5)
  Top 0.305: R20.2 41.66,4.08 42.58,4.08 43.36,4.86 R21.1 43.36,8.86 43.08,9.14 v41.59,9.14 | v41.58,11.28 41.58,17.75 C19.1
  Bottom 0.305: v41.59,9.14 v41.58,11.28
N$38
  Top 0.305: C18.1 57.5,16.05 56.9,15.45 54.19,15.45 R18.1
N$39  (via drill 0.5)
  Top 0.305: IC5.6 47.92,11.66 v47.94,11.65 | v3.43,40.91 3.43,44.03 R22.1
  Bottom 0.305: v47.94,11.65 57.02,11.65 57.95,12.58 57.95,15.16 57.71,15.4 50.49,15.4 48.03,17.86 48.03,19.84 46.98,20.89 36.49,20.89 36.31,20.71 30.46,20.71 30.25,20.5 28.72,20.5 28.52,20.7 28.52,21.32 28.2,21.64 27.05,21.64 26.8,21.39 5.2,21.39 3.2,23.39 3.2,40.68 v3.43,40.91
N$40
  Top 0.305: RN1.8 25.56,14.84 25.66,14.74 26.25,14.74 26.5,14.49 | 26.5,14.49 26.66,14.33 26.66,13 26.48,12.82 25.39,12.82 25.09,12.52 25.09,11.76 RN3.5 | 26.5,14.49 27.67,15.67 35.27,15.67 35.61,16.01 35.61,18.22 36.13,18.74 C19.2
N$41  (via drill 0.5)
  Top 0.305: RN3.6 24.19,12.47 v25.46,13.74 24.78,14.42 24.78,15.53 RN1.7 | v26.77,10.19 26.77,9.74 26.22,9.19 25.18,9.19 25.01,9.36 25.01,10.04 RN3.4
  Bottom 0.305: v25.46,13.74 25.46,13.6 26.77,12.29 v26.77,10.19
N$42  (via drill 0.5)
  Top 0.305: RN3.7 23.39,12.9 v24.06,13.57 23.96,13.67 RN1.6 | RN3.3 24.16,10.03 24.16,9.28 25.01,8.43 v25.01,8.04
  Bottom 0.305: v25.01,8.04 24.42,7.45 23.94,7.45 23.87,7.52 23.87,8.54 24.06,8.73 v24.06,13.57
N$43
  Top 0.305: RN3.8 22.59,12.58 | 22.59,12.58 22.59,13.16 23.17,13.74 RN1.5 | RN3.2 23.37,10.04 23.37,9.29 23.39,9.29 23.87,8.81 23.87,7.86 23.74,7.73 22.01,7.73 21.49,8.25 21.49,12.08 21.84,12.43 22.44,12.43 22.59,12.58
N$44
  Top 0.305: RN2.6 RN2.7 27.02,4.65 27.74,5.37 27.74,13.17 28.51,13.94 33.01,13.94 R23.2
N$45  (via drill 0.5)
  Top 0.305: 25.81,5.38 v25.87,5.53 25.79,5.45 RN2.8 | v22.64,8.85 22.63,10.02 RN3.1 | v28.61,4.15 31.66,7.2 31.66,9.99 33.85,12.18 34.58,12.18 34.94,12.54 34.94,13.83 R23.1
  Bottom 0.305: v22.64,8.85 22.65,8.55 22.65,6.09 22.88,5.86 25.38,5.86 v25.87,5.53 25.87,5.43 27.33,5.43 v28.61,4.15
N$46  (via drill 0.5)
  Top 0.305: RN2.2 20.26,4.65 19.43,3.82 18.71,3.82 IC6.2 v15.08,3.81 | D3.2 10.78,17.12 10.78,13.81 11.85,12.74 v12.97,12.74
  Bottom 0.305: v15.08,3.81 13.25,3.81 12.66,4.4 12.66,12.43 v12.97,12.74
N$47  (via drill 0.5)
  Top 0.305: RN2.1 22.67,5.42 19.91,5.42 19.55,5.06 18.7,5.06 | 18.7,5.06 IC6.3 | 10.11,20.75 D4.2 10.16,19.14 10.52,18.78 12.04,18.78 12.29,18.53 12.31,18.53 12.33,18.51 12.33,16.43 12.01,16.11 12.01,14.54 12.9,13.65 v14.03,13.65 | 18.7,5.06 v14.04,5.06 v14.03,5.05
  Bottom 0.305: v14.03,5.05 v14.03,13.65
N$48  (via drill 0.5)
  Top 0.305: RN1.4 23.18,17.17 23.18,17.85 23.01,18.02 22.51,18.02 22.18,17.69 v22.18,14.7 22.18,14.06 20.88,12.76 20.88,9.65 20.11,8.88 IC6.6 | v13.24,17.75 13.24,18.49 12.39,19.34 12.39,20.7 D5.2
  Bottom 0.305: v22.18,14.7 17.85,14.7 15.22,17.33 13.66,17.33 v13.24,17.75
N$49  (via drill 0.5)
  Top 0.305: IC6.7 19.9,10.15 20.28,10.53 20.28,13.19 21.26,14.17 21.26,15.56 v21.24,15.58 21.24,17.73 22.12,18.61 23.5,18.61 23.9,18.21 23.9,17.21 RN1.3 | v14.96,18.49 14.96,18.56 14.39,19.13 14.39,20.75 D6.2
  Bottom 0.305: v21.24,15.58 17.88,15.58 16.66,16.8 16.65,16.8 v14.96,18.49
N$50  (via drill 0.5)
  Top 0.305: RN1.2 24.68,17.23 24.68,18.38 23.86,19.2 21.95,19.2 19.8,17.05 19.8,16.63 v19.7,16.53 19.7,11.65 19.47,11.42 IC6.8 | v16.73,18.18 16.73,18.2 16.5,18.43 16.5,20.73 D7.2
  Bottom 0.305: v19.7,16.53 18.38,16.53 v16.73,18.18
N$51
  Top 0.305: D8.2 18.73,20.77 18.73,19.83 19.08,19.48 19.37,19.48 20.33,18.52 | IC6.9 16.35,12.69 15.54,13.5 15.54,14.02 16.78,15.26 17.07,15.26 20.33,18.52 | RN1.1 25.56,18.36 24.06,19.86 21.67,19.86 20.33,18.52
N$52
  Top 0.305: D8.1 D7.1 D6.1 D5.1 D4.1 8.68,24.2 8.27,23.79 8.27,19.8 7.75,19.28 7.75,18.36 7.72,18.33 7.72,16.94 7.67,16.89 | IC6.11 9.19,15.02 7.67,16.54 7.67,16.89 | D3.1 7.67,16.89
N$53  (via drill 0.5)
  Top 0.305: 33.2,19.91 R14.2 33.19,19.9 32.32,19.9 31.73,19.31 v30.95,19.31 | v16.67,11.3 16.67,11.28 16.12,10.73 11.82,10.73 v11.79,10.63 | v11.03,12.32 10.66,12.65 9.21,12.65 IC6.12
  Bottom 0.305: v16.67,11.3 17.12,11.75 20.71,11.75 22.41,13.45 22.41,13.46 28.25,19.3 v30.94,19.3 v30.95,19.31 | v11.03,12.32 11.69,11.62 11.75,10.74 v11.79,10.63
N$54
  Top 0.305: C24.2 55.68,36.16 55.48,35.96 55.09,35.96 54.84,35.71 U$2.9
N$55  (via drill 0.5)
  Top 0.305: v7.9,3.72 9.09,3.72 IC6.19 | Q5.3 3.18,20.25 3.18,21.67 2.58,22.27 v2.4,22.27 2.05,22.62 1.91,22.76 1.3,23.37 1.3,35.44 2.04,36.18 R24.2
  Bottom 0.305: v7.9,3.72 7.94,3.7 7.59,3.7 6.92,4.37 5.58,4.37 | 5.58,4.37 2.16,4.37 1.59,4.94 1.59,21.46 v2.4,22.27 | SV4.3 5.62,4.41 5.58,4.37
N$56  (via drill 0.5)
  Top 0.305: R32.2 58.5,24.64 57.51,25.63 57.51,31.29 62.6,36.38 62.6,37.65 63.98,39.03 v63.98,40.47 v63.99,40.48 C26.2
  Bottom 0.305: v63.98,40.47 v63.99,40.48
N$57
  Top 0.305: R39.1 35.16,5.15 34.22,6.09 34.22,10.77 34.69,11.24 R38.2 36.04,11.51 36.04,12.98 36.39,13.33 37.64,13.33 38.03,12.94 IC5.2
N$58  (via drill 0.5)
  Top 0.305: R8.1 22.31,23.91 21.16,22.76 9.65,22.76 9.13,22.24 9.11,22.22 | v2.52,16.7 2.52,16.9 2.14,17.28 Q5.1 | 9.11,22.22 9.09,22.2 | v9.61,15.77 9.61,18.05 9.11,18.55 9.11,22.22
  Bottom 0.305: v2.52,16.7 2.88,17.06 5.77,17.06 6.01,16.82 6.03,16.82 6.68,16.17 9.21,16.17 v9.61,15.77 9.8,15.58 v12.97,15.58 v12.98,15.59
N$59
  Top 0.305: C11.1 70.28,21.25 | 70.28,21.25 71.16,22.13 71.16,23.74 C30.2 74.62,23.76 X1.5 | R30.1 59.31,25.59 60.51,24.39 65.42,24.39 68.13,21.68 69.85,21.68 70.28,21.25
N$60  (via drill 0.5)
  Top 0.305: SV3.3 4.98,39.87 v11.66,33.19 | v34.55,32.73 34.55,32.44 33.3,31.19 32.2,31.19 IC1.7
  Bottom 0.305: v11.66,33.19 17.83,33.19 18.7,32.32 34.14,32.32 v34.55,32.73
N$61  (via drill 0.5)
  Top 0.305: SV3.5 7.52,38.43 11.4,34.55 v12.39,34.55 | IC1.10 42.53,28.72 42.95,28.3 44.1,28.3 44.98,29.18 44.98,32.07 v44.29,32.75
  Bottom 0.305: v12.39,34.55 13.17,34.55 13.83,33.89 18.93,33.89 19.14,33.68 35.67,33.68 35.98,33.37 43.58,33.37 44.2,32.75 v44.29,32.75
N$62  (via drill 0.5)
  Top 0.305: IC1.4 33.48,35.06 v36.29,37.87
  Bottom 0.305: v36.29,37.87 57.76,37.87 59.19,39.3 59.19,50.07 57.39,51.87 54.39,51.87 SV1.1
N$63  (via drill 0.5)
  Top 0.305: C26.1 R33.2 69.1,38.09 69.57,37.62 v72.07,37.62 v72.08,37.61 | C27.1 72.75,32.7 71.84,33.61 | 71.84,33.61 U1.6 | v72.09,34.78 72.09,33.86 71.84,33.61
  Bottom 0.305: v72.08,37.61 v72.08,34.79 v72.09,34.78
N$64
  Top 0.305: U1.2 63.73,34.88 63.25,35.36 63.25,37.35 63.99,38.09 R33.1
N$65  (via drill 0.5)
  Top 0.305: C30.1 69.44,24.66 71.05,26.27 C27.2 68.86,28.92 v68.03,28.09 | U1.3 63.42,33.6 | 63.42,33.6 v63.41,33.62 | 63.42,33.6 62.08,33.6 61.68,33.21 R34.1
  Bottom 0.305: v68.03,28.09 68.03,29 v63.41,33.62
N$66  (via drill 0.5)
  Top 0.305: C28.1 66.27,26.15 v66.91,26.79 | v70.03,30.55 70.03,32.33 U1.5 | v59.84,29.84 59.84,31.93 R34.2
  Bottom 0.305: v66.91,26.79 66.91,27.03 | 66.91,27.03 68.51,27.03 69.21,27.73 69.21,29.73 v70.03,30.55 | 66.91,27.03 66.76,27.03 63.55,30.24 60.24,30.24 v59.84,29.84
N$67  (via drill 0.5)
  Top 0.305: R35.2 63.31,21.99 63.31,19.42 64.2,18.53 C18.2 67.07,16.05 v67.09,16.03
  Bottom 0.305: v67.09,16.03 71.02,16.03 81.52,5.53 R9.2
N$68  (via drill 0.5)
  Top 0.305: R25.2 12.62,44.78 10.39,42.55 10.39,39.58 v12.5,37.47 | IC1.11 42.45,29.99 42.58,29.86 42.58,29.57 43.07,29.08 43.95,29.08 44.31,29.44 44.31,30.9 43.29,31.92 43.29,33.04 44,33.75 44,36.09 v44.86,36.95
  Bottom 0.305: v12.5,37.47 12.58,37.47 13.25,36.8 35.7,36.8 35.85,36.95 | 35.85,36.95 35.86,36.96 | v44.86,36.95 35.85,36.95
N$69  (via drill 0.5)
  Top 0.305: R35.1 60.03,22.1 v59.98,22.15 | v53.57,25.21 U$2.7
  Bottom 0.254: 57.45,22.15 57.44,22.15 57.44,22.14
  Bottom 0.305: 57.44,22.14 54.4,22.14 53.65,22.89 53.65,25.13 v53.57,25.21 | 57.45,22.15 v59.98,22.15
  Bottom 0.406: v59.98,22.14 v59.98,22.15
N$70
  Top 0.305: SV3.10 12.68,53.24 13.83,52.09 13.83,48.04 13.6,47.81 12.71,47.81 R25.1
N$71
  Top 0.305: IC6.18 9.1,5 7.7,5 7.06,4.36 7.06,3.6 6.59,3.13 SV4.1
N$72  (via drill 0.5)
  Top 0.305: v19.94,2.95 19.81,2.86 19.48,2.53 IC6.1 | v16.86,8.26 v11.77,8.26 v11.76,8.27
  Bottom 0.305: v19.94,2.95 19.81,2.95 19.81,7.79 19.34,8.26 v16.86,8.26 | v11.76,8.27 5.68,8.27 SV4.5
N$73
  Top 0.305: IC6.17 9.11,6.4 7.78,6.4 7.11,7.07 3.64,7.07 3.15,6.58 3.15,5.74 SV4.4
N$74  (via drill 0.5)
  Top 0.305: Q3.3 65.55,46.21 65.57,46.23 67.2,46.23 68.14,45.29 v68.62,45.29 v68.63,45.3
  Bottom 0.305: X1.3 72.29,30.7 67.36,35.63 67.36,44.03 v68.63,45.3
N$75  (via drill 0.5)
  Top 0.305: R26.2 10.13,45.09 9.01,43.97 9.01,39.14 v12.07,36.08 | v36.61,36.09 36.61,32.96 33.61,29.96 32.16,29.96 IC1.8
  Bottom 0.305: v12.07,36.08 35.4,36.08 35.41,36.09 v36.61,36.09
N$76  (via drill 0.5)
  Top 0.254: 7.42,19.84 7.39,19.81
  Top 0.305: R36.1 v2.45,15.53 | 9.12,11.47 IC6.13 9.14,11.39 8.38,11.39 8.08,11.69 8.08,14.6 v7.38,15.3 6.34,16.34 6.34,18.76 7.39,19.81 | R37.2 71.74,44.73 C31.2 63.62,42.24 62.42,41.04 v62.42,39.25 | 7.42,19.84 7.68,20.1 v7.68,24.97
  Bottom 0.305: v7.38,15.3 7.36,15.28 7.36,15.26 6.7,15.26 5.92,16.04 5.92,16.05 5.72,16.25 4.13,16.25 3.4,15.52 v2.46,15.52 v2.45,15.53 | v7.68,24.97 7.68,25.85 8.46,26.63 14.15,26.63 18.26,30.74 45.07,30.74 45.59,31.26 47.22,31.26 48.1,30.38 49.32,30.38 50.14,31.2 58.93,31.2 62.42,34.69 v62.42,39.25
N$78
  Top 0.305: SV3.8 10.02,53.24 8.92,52.14 8.92,48.65 9.53,48.04 10.03,48.04 R26.1
N$79  (via drill 0.5)
  Top 0.305: R40.2 35.11,1.87 v35.08,1.9 | v6.07,22.43 6.07,20.5 v6.08,20.4
  Bottom 0.305: R27.2 11.05,27.53 8.01,27.53 6.07,25.59 v6.07,22.43 | v6.08,20.4 6.08,17.7 7.03,16.75 14.82,16.75 15.34,16.23 15.34,14.12 15.02,13.8 15.02,13.17 14.67,12.82 14.67,5.63 15.89,4.41 15.89,2.27 16.26,1.9 v35.08,1.9
N$80  (via drill 0.5)
  Top 0.305: v42.38,40.18 42.38,39.75 42.79,39.34 42.79,39.06 42.58,38.85 41.74,38.85 IC1.18
  Bottom 0.305: R27.3 13.53,40.47 42.09,40.47 v42.38,40.18

## Text on the board
Top: Raspi PR Modem | RFguy